# Altium PCB PCB2.PcbDoc
Units mil, origin at the board's own origin, x right, y up, seen from the top; angles counter-clockwise.
Board outline 2655 x 1200 mil, 2 copper layers (Top Layer, Bottom Layer); 25 components, 22 nets, 85 pads, 9 vias.
Unrouted connection lines stored in the file: 2.
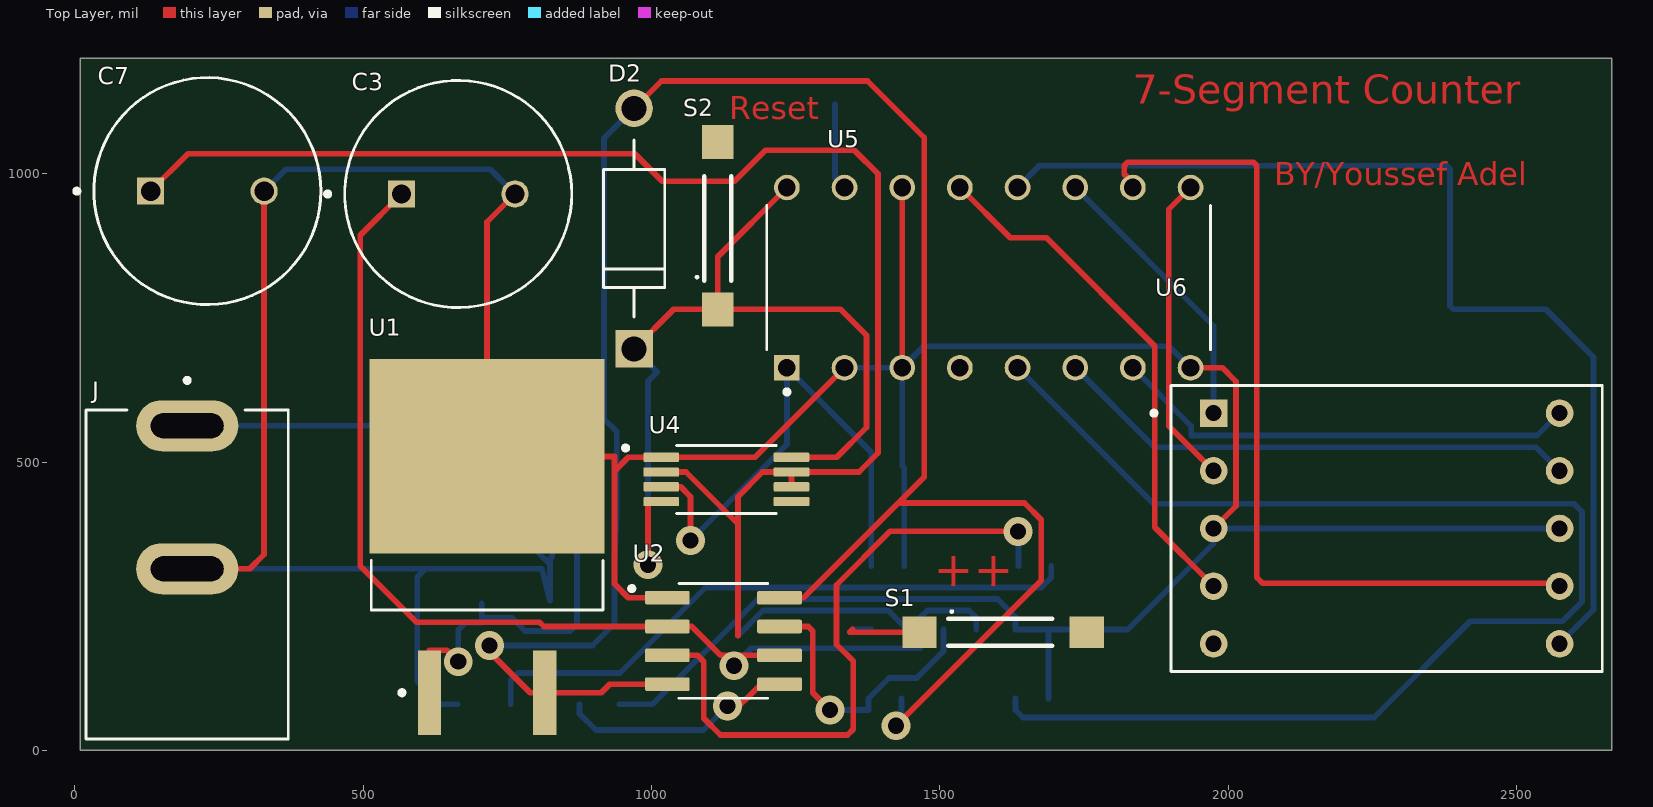
[diagram p0: Top Layer view]
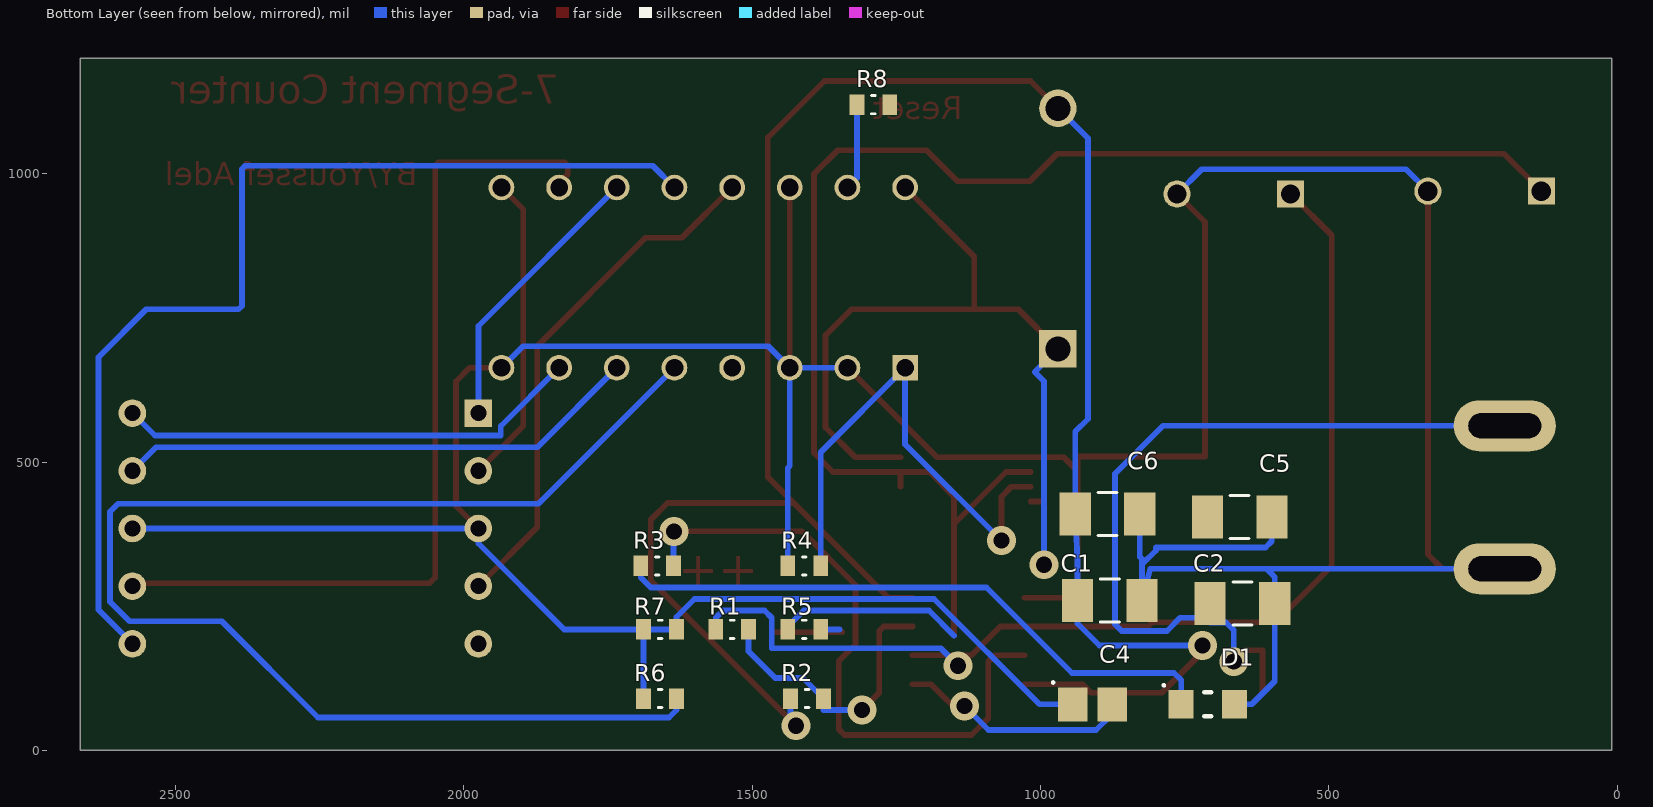
[diagram p1: Bottom Layer view, seen from below]
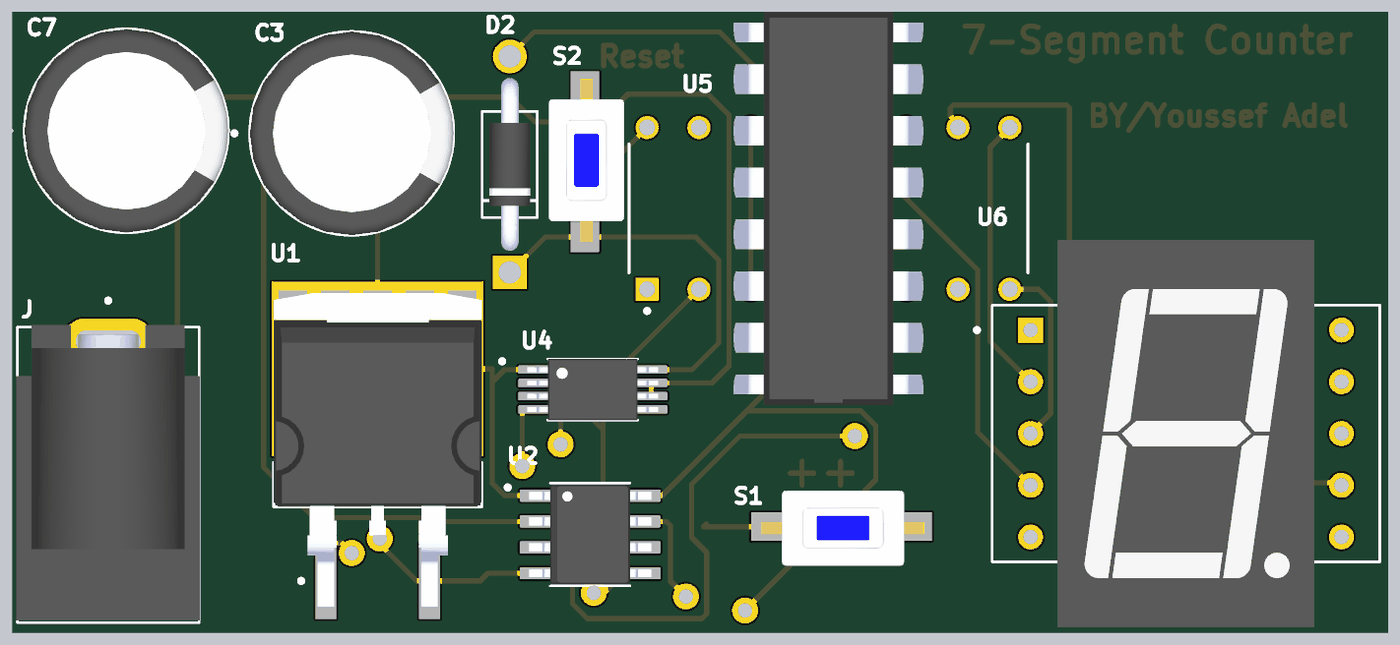
[diagram p2: 3D render of the assembled board from above, using the file's embedded part models]
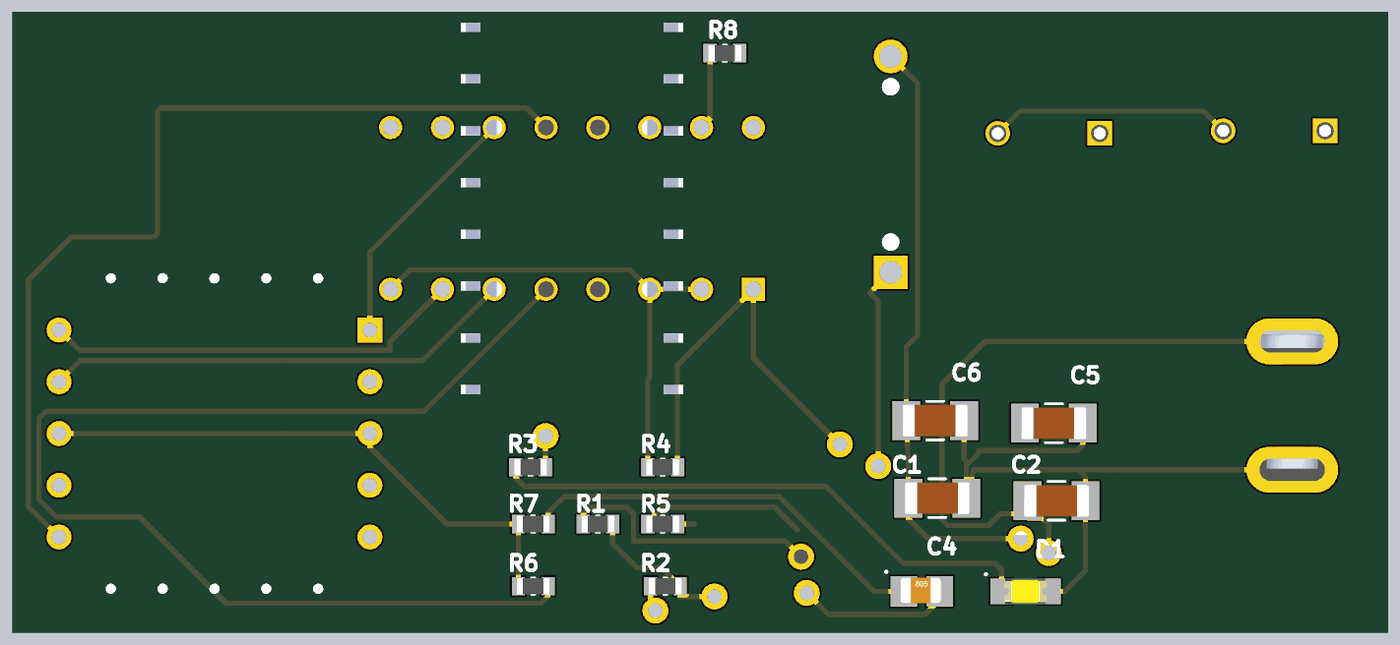
[diagram p3: 3D render of the assembled board from below, using the file's embedded part models]

## Layer stack, top to bottom
Top Solder: solder mask 0.4, Solder Resist, Dk 3.5
Top Layer: signal copper 1.4
Dielectric 1: dielectric 12.6, FR-4, Dk 4.8
Bottom Layer: signal copper 1.4
Bottom Solder: solder mask 0.4, Solder Resist, Dk 3.5

## Board outline
10,0 2665,0 2665,1200 10,1200

## Design rules (kind name [scope] priority, off if disabled: settings)
Clearance [All] p1: gap=10 ignorepadtopadclearanceinfootprint=FALSE
PolygonConnect [All] p1: connectstyle=Relief reliefconductorwidth=10 reliefentries=4 polygonreliefangle="90 Angle" airgapwidth=10
RoutingVias [All] p1: holewidth=28 width=50 viastyle="Through Hole" minholewidth=28 minwidth=50 maxholewidth=28 maxwidth=50
SolderMaskExpansion [All] p1: expansion=4 istentingtop=FALSE
SupplyNets "Schematic Supply Nets_1" [InNet('VCC')] p1: voltage=0.000
SupplyNets "Schematic Supply Nets" [InNet('GND')] p2: voltage=0.000
Width [All] p1: maxlimit=10 minlimit=10 preferedwidth=10
30 further rules are at their usual default settings.

## Classes and differential pairs
component class Sheet2: C5 C6 C7 D2 R4 R5 R6 R7 R8 S1 S2 U4 U5 U6
component class Sheet1: C1 C2 C3 C4 D1 R1 R2 R3 U1 U2

## Components (designator, comment, footprint, x,y, rotation, side; value= is the part's Value field where it differs from the comment)
C1 ".1µF" CAPC3216X190N 880,260 r180 bottom
C2 ".33µF" CAPC3216X190N 650,255 r180 bottom
C3 "EEUED2G100" CAPPRD500W60D1000H2000 665,965 r0 top
C4 "100nF Ceramic Multilayer Capacitor_1" CAPCP2012X09N 910,80 r180 bottom
C5 ".33µF" CAPC3216X190N 655,405 r180 bottom
C6 ".1µF" CAPC3216X190N 884.06,410 r180 bottom
C7 "EEUED2G100" CAPPRD500W60D1000H2000 230,970 r0 top
D1 "Kingbright Orange LED, 200 mcd 120 ° 0805" LED1913X12NYEL/ORANGE 710,80 r180 bottom
D2 "1N4007" DIOAD1060W80L520D270 970,905 r90 top
J "PJ-037AH" CUI_PJ-037AH 195,563.03 r270 top
R1 "Resistor" RES_ERJS03F1001V 1535,210 r180 bottom value=1K
R2 "Resistor" RES_ERJS03F1001V 1405,90 r180 bottom value=1K
R3 "Resistor" RES_ERJS03F1001V 1665,320 r180 bottom value=1K
R4 "Resistor" RES_ERJS03F1001V 1410,320 r180 bottom value=220
R5 "Resistor" RES_ERJS03F1001V 1410,210 r180 bottom value=47k
R6 "Resistor" RES_ERJS03F1001V 1660,90 r180 bottom value=47k
R7 "Resistor" RES_ERJS03F1001V 1660,210 r180 bottom value=470
R8 "Resistor" RES_ERJS03F1001V 1290,1120 r180 bottom value=10k
S1 "Button Tactile Switch, NO 0.05 A 0.8mm" Button8014X17N 1605,205 r0 top
S2 "Button Tactile Switch, NO 0.05 A 0.8mm" Button8014X17N 1115,905 r90 top
U1 "7805CD2T" TO254P1542X460-3N 715,352.52 r90 top
U2 "LM555CM/NOPB" SOIC127P599X175-8N 1125,190 r0 top
U4 "NE555PW" SOP65P640X120-8N 1130,470 r0 top
U5 "CD4033BE" DIP794W45P254L1969H508Q16 1585,820 r90 top
U6 "LDSC512RI" LED_LDSC512RI 2275,385 r0 top

## Footprints (in the part's own frame and the unit in brackets; to place one, negate y for a bottom-side part, rotate by r counter-clockwise, add the part's x,y. Pads: shape width x height; smd on the part's side, far side on the other; paste and mask are expansions set on the pad)
Button8014X17N [mm] "Chip Inductor, 2-Leads, Body 8.00x1.40mm, IPC Medium Density"
  rect 1.5x1.4 smd: 1(-3.556,0) 2(3.81,0)
  silkscreen extent -2.3,-0.6 2.3,0.96, body extent -3.79,-1.92 4.21,1.78, height 2.5
CAPC3216X190N [mm]
  rect 1.37x1.91 smd: 1(-1.421,0) 2(1.421,0)
  silkscreen extent -0.42,-0.95 0.42,0.95, body extent -1.6,-0.8 1.6,0.8, height 1.9
CAPCP2012X09N [mm] "Chip Capacitor, 2-Leads, Body 2.00x1.25mm, IPC Medium Density"
  rect 1.3x1.5 smd: 1(-0.875,0) 2(0.875,0)
  silkscreen extent -1.79,0.91 -1.69,1.01, body extent -1.05,-0.57 0.95,0.68, height 0.78
CAPPRD500W60D1000H2000 [mm]
  round 1.2 hole 0.85: N(2.5,0)
  rect 1.2x1.2 / inner round 1.2 / far side rect 1.2x1.2 hole 0.85: P(-2.5,0)
  silkscreen extent -5.85,-5 5,5, body extent -5,-5 5,5, height 20
CUI_PJ-037AH [mm]
  oval 2.25x4.5 hole 1.1 slot 3.2 at 90 deg: 1(0,0) 2(6.3,0)
  silkscreen extent -2.1,-4.45 13.8,4.45, body extent -0.8,-4.5 13.7,4.5, height 11
DIOAD1060W80L520D270 [mm]
  round 1.65 hole 1.1: A(5.3,0)
  rect 1.65x1.65 / inner round 1.65 / far side rect 1.65x1.65 hole 1.1: C(-5.3,0)
  silkscreen extent -3.9,-1.35 3.9,1.35, body extent -4.24,-1 4.24,1, height 2
DIP794W45P254L1969H508Q16 [mm]
  rect 1.13x1.13 hole 0.78: 1(-3.97,8.89)
  round 1.13 hole 0.78: 2(-3.97,6.35) 3(-3.97,3.81) 4(-3.97,1.27) 5(-3.97,-1.27) 6(-3.97,-3.81) 7(-3.97,-6.35) 8(-3.97,-8.89) 9(3.97,-8.89) 10(3.97,-6.35) 11(3.97,-3.81) 12(3.97,-1.27) 13(3.97,1.27) 14(3.97,3.81) 15(3.97,6.35) 16(3.97,8.89)
  silkscreen extent -5.13,-9.77 3.18,9.77, body extent -9.65,-5.46 9.65,5.46, height 5.08
LED1913X12NYEL/ORANGE [mm] "LED 2-Leads, Body 1.90x1.32mm, IPC Medium Density"
  rect 1.1x1.25 smd: 1(-1.175,0) 2(1.175,0)
  silkscreen extent -1.99,-0.53 0.15,0.89, body extent -1.01,-0.62 1.01,0.63, height 1.1
LED_LDSC512RI [mm]
  rect 1.218x1.218 / inner round 1.218 / far side rect 1.218x1.218 hole 0.71: 1(-7.62,5.08)
  round 1.218 hole 0.71: 2(-7.62,2.54) 3(-7.62,0) 4(-7.62,-2.54) 5(-7.62,-5.08) 6(7.62,-5.08) 7(7.62,-2.54) 8(7.62,0) 9(7.62,2.54) 10(7.62,5.08)
  silkscreen extent -10.35,-6.3 9.5,6.3, body extent -6.3,-9.5 6.3,9.5, height 8
RES_ERJS03F1001V [mm]
  rect 0.65x0.9 smd: 1(-0.725,0) 2(0.725,0)
  silkscreen extent -0.08,-0.4 0.08,0.4, body extent -0.8,-0.4 0.8,0.4, height 0.45
SOIC127P599X175-8N [mm]
  rrect25% 1.97x0.6 smd: 1(-2.47,1.905) 2(-2.47,0.635) 3(-2.47,-0.635) 4(-2.47,-1.905) 5(2.47,-1.905) 6(2.47,-0.635) 7(2.47,0.635) 8(2.47,1.905)
  silkscreen extent -4.14,-2.53 1.95,2.53, body extent -3,-2.45 3,2.45, height 1.75
SOP65P640X120-8N [mm]
  rrect25% 1.57x0.41 smd: 1(-2.87,0.975) 2(-2.87,0.325) 3(-2.87,-0.325) 4(-2.87,-0.975) 5(2.87,-0.975) 6(2.87,-0.325) 7(2.87,0.325) 8(2.87,0.975)
  silkscreen extent -4.54,-1.5 2.2,1.5, body extent -3.2,-1.5 3.2,1.5, height 1.2
TO254P1542X460-3N [mm]
  rect 3.74x1.02 smd: 1(-6.41,2.54) 2(-6.41,-2.54)
  rect 8.56x10.37 smd paste-6: 3(4,0)
  silkscreen extent -6.51,-5.1 -0.59,5.1, body extent -7.71,-5.1 7.71,5.1, height 4.6

## Part data
C1 C2 C5 C6: library part GRM31CR60J227ME11L, "SMD Multilayer Ceramic Capacitor, GRM Series, 220 F, 20%, X5R, 6.3 V, 1206 [3216 Metric]", Package="3216 Murata", Check_prices=https://www.snapeda.com/parts/GRM31CR60J227ME11L/Murata%20Electronics%20North%20America/view-part/1756709/?ref=eda, Digi-Key_Part_Number=490-13970-1-ND, MF="Murata Electronics", MP=GRM31CR60J227ME11L, Purchase-URL=https://pricing.snapeda.com/search/part/GRM31CR60J227ME11L/?ref=eda, SnapEDA_Link=https://www.snapeda.com/parts/GRM31CR60J227ME11L/Murata%20Electronics%20North%20America/view-part/1756709/?ref=snap
C3 C7: "10F 400V Aluminum Electrolytic Capacitors Radial, Can 8000 Hrs @ 105C", Package="RADIAL-2 Panasonic", Check_prices=https://www.snapeda.com/parts/EEU-ED2G100/Panasonic+Electronic+Components/view-part/?ref=eda, MF="Panasonic Electronic", MP=EEU-ED2G100, SnapEDA_Link=https://www.snapeda.com/parts/EEU-ED2G100/Panasonic+Electronic+Components/view-part/?ref=snap
C4: "AVX 0805 Standard 100nF Ceramic Multilayer Capacitor, 50 V dc X7R Dielectric ±10% SMD", Capacitance=100nF, Manufacturer=AVX, Package=0805, Voltage=50V, Creator="Ritesh Kanjee", Datasheet URL=http://za.rs-online.com/web/p/ceramic-multilayer-capacitors/4646688/, Date Created="18 February 2015", RS Stock No.=464-6688
D1: Color=Orange, Forward Voltage=1.85V, Manufacturer=KingBright, Manufacturer Part No.=KP-2012SEC, Creator="Ritesh Kanjee", Datasheet URL=http://za.rs-online.com/web/p/visible-leds/4663790/, Date Created="18 February 2015", RS Stock No.=466-3790
D2: "Diode Standard 1000 V 1A Through Hole DO-41", Package="DO-41 NTE Electronics", Availability="In Stock", Check_prices=https://www.snapeda.com/parts/1N4007/NTE+Electronics/view-part/?ref=eda, MF="NTE Electronics, Inc.", MP=1N4007, Price=None, Purchase-URL=https://pricing.snapeda.com/search/part/1N4007/?ref=eda, SnapEDA_Link=https://www.snapeda.com/parts/1N4007/NTE+Electronics/view-part/?ref=snap
J: "2.0 x 6.5 mm, 5.0 A, Horizontal, Through Hole, Dc Power Jack Connector", Package=None, Check_prices=https://www.snapeda.com/parts/PJ-037AH/CUI+Devices/view-part/?ref=eda, CUI_purchase_URL=https://www.cuidevices.com/product/interconnect/connectors/dc-power-connectors/jacks/pj-037ah?utm_source=snapeda.com&utm_medium=referral&utm_campaign=snapedaBOM, MF="CUI Devices", MP=PJ-037AH, SnapEDA_Link=https://www.snapeda.com/parts/PJ-037AH/CUI+Devices/view-part/?ref=snap
S1 S2: Manufacturer="C & K", Manufacturer Part No.=B3F1000, Creator="R Kanjee", Date Created="25 February 2015", RS Stock No.=516-255, State="Normaly Open"
U1: "Linear Voltage Regulator IC Positive Fixed 1 Output 1.5A D2PAK", Package="D2PAK STMicroelectronics", Check_prices=https://www.snapeda.com/parts/7805CD2T/STMicroelectronics/view-part/?ref=eda, MF=STMicroelectronics, MP=7805CD2T, SnapEDA_Link=https://www.snapeda.com/parts/7805CD2T/STMicroelectronics/view-part/?ref=snap
U2: "Highly Stable 555 Timer", Package="SOIC-8 Texas Instruments", Availability="In Stock", Check_prices=https://www.snapeda.com/parts/LM555CM/NOPB/Texas+Instruments/view-part/?ref=eda, MF="Texas Instruments", MP=LM555CM/NOPB, Price=None, Purchase-URL=https://pricing.snapeda.com/search/part/LM555CM/NOPB/?ref=eda, SnapEDA_Link=https://www.snapeda.com/parts/LM555CM/NOPB/Texas+Instruments/view-part/?ref=snap
U4: "Single Precision Timer 8-TSSOP 0 to 70", Package="TSSOP-8 Texas Instruments", Availability="In Stock", Check_prices=https://www.snapeda.com/parts/NE555PW/Texas+Instruments/view-part/?ref=eda, MF="Texas Instruments", MP=NE555PW, Price=None, Purchase-URL=https://pricing.snapeda.com/search/part/NE555PW/?ref=eda, SnapEDA_Link=https://www.snapeda.com/parts/NE555PW/Texas+Instruments/view-part/?ref=snap
U5: "CMOS Decade Counter/Divider with Decoded 7-Segment Display Outputs and Ripple Blanking 16-PDIP -55 to 125", Package="PDIP-16 Texas Instruments", Availability=Good, Check_prices=https://www.snapeda.com/parts/CD4033BE/Texas%20Instruments/view-part/627730/?ref=eda, MF="Texas Instruments", MP=CD4033BE, Price=None, Purchase-URL=https://pricing.snapeda.com/search/part/CD4033BE/?ref=eda, SnapEDA_Link=https://www.snapeda.com/parts/CD4033BE/Texas%20Instruments/view-part/627730/?ref=snap
U6: "DISPLAY, 7 SEGMENT, 14.2MM, GREEN; LED Colour:Green; Forward Current If:10mA; Forward Voltage:2.2V; Luminous Intensity:3.5mcd; No. of Digits / Alpha:1; Character Size:14.2mm; Common Connection:Common Cathode; Product Range:-; SVHC:No SVHC (27-Jun-2018)", Package="DIP-10 Lumex", Check_prices=https://www.snapeda.com/parts/LDSC512RI/Lumex/view-part/?ref=eda, MF="Lumex Optoelectronics", MP=LDSC512RI, SnapEDA_Link=https://www.snapeda.com/parts/LDSC512RI/Lumex/view-part/?ref=snap
R1 R2 R3 R4 R5 R6 R7 R8: SimulationGenericComponent=True, TC1=0, TC2=0

## Via types
v1: diameter 50, hole 28, Top Layer to Bottom Layer, 9 vias

## Nets (pads, with @x,y where several pads share a name; then routed paths per layer and width w, separated by ;. In a path a pad name is that pad's centre, name@x,y a point inside that pad or via, vN(x,y) a via of type N, cw(c..) or ccw(c..) an arc to the next point about the centre after c; other vN are vias at no path point)
GND: C1.2 C2.2 C3.N C4.1 C5.2 C6.2 C7.N D1.2 J.2 R4.1 R6.1 R7.1 R7.2 U1.3 U2.1 U4.1 U5.2 U5.3 U5.8 U5.14 U6.3 U6.8 | length 7728.5
  Top Layer w10: J.2 303.43,315 328.43,340 C7.N ; C3.N 715,916.57 U1.3 935.94,510 935.94,484.33 ; U2.1 960,265 935.94,289.06 935.94,484.33 ; U5.2 1179.69,508.39 U4.1 960,508.39 935.94,484.33 ; U5.3 U5.14 ; U5.8 1990.3,663.7 2014,640 2014,424 U6.3
  Bottom Layer w10: J.2 608.08,315 ; C7.N 366.43,1008 720.43,1008 C3.N ; C5.2 599.06,362.94 610,352 800,352 800,347 824.06,322.94 ; D1.2 634.05,80 594.05,120 C2.2 594.05,300.95 608.08,315 ; C6.2 828.11,336.06 824.06,332 824.06,322.94 ; C4.1 1002,80 1184.72,262.72 1600.28,262.72 1631.46,231.54 R7.2 R7.1 ; U5.2 U5.3 ; R4.1 1438.54,490 1435,493.54 U5.3 ; R6.1 R7.1 ; U5.8 1897.7,701 1472.3,701 U5.3 ; U6.8 U6.3 1975,359 1826,210 R7.1 ; 608.08,315 810,315 C1.2 824.06,322.94
NetC2_1: C2.1 J.1 U1.1 | length 1416.8
  Top Layer w10: U1.1 615,174 645,174 v1(665,154)
  Bottom Layer w10: J.1 787.97,563.03 871,480 871,219 859.4,207.4 781,207.4 758.4,230 C2.1@705.94,230 ; v1(665,154) 665,208.75 678.4,222.15 705.94,222.15 C2.1@705.94,230 ; C2.1 C2.1@705.94,230
NetC3_P: C3.P R1.1 U2.2 U2.6 | length 2007.9
  Top Layer w10: C3.P 495,893.43 495,320 592.48,222.52 806.14,222.52 813.66,215 U2.2 1070,215 1120,165 1161,165 ; v1(1143,147) 1161,165 ; U2.6 1161,165
  Bottom Layer w10: v1(1143,147) 1173.28,177.28 1466.34,177.28 1466.34,230 1479.06,242.72 1550.82,242.72 1563.54,230 R1.1
NetC4_2: C4.2 U2.5 | length 435.9
  Top Layer w10: v1(1132,77) 1132,57 1190,115 U2.5
  Bottom Layer w10: C4.2 875.55,63.78 903.86,35.47 1090.47,35.47 v1(1132,77)
NetC5_1: C5.1
NetC7_P: C7.P R5.1 U4.2 U4.6 U4.7 | length 2866.2
  Top Layer w10: C7.P 196.57,1035 971,1035 1019,987 1144,987 1198,1041 1352,1041 1393,1000 1393,515.8 1360,482.8 U4.7 ; U4.2 1060,482.8 1150,392.8 ; 1150,199 1150,392.8 ; U4.6 U4.7 ; 1150,392.8 1150,440 1192.8,482.8 U4.7
  Bottom Layer w10: 1150,199 1193.72,242.72 1410.82,242.72 1438.54,215 R5.1
NetD1_1: D1.1 R3.1 | length 1073.2
  Bottom Layer w10: D1.1 756.26,122.26 768.49,134.49 945.76,134.49 1093.98,282.72 1676.26,282.72 1693.54,300 R3.1
NetD2_C: D2.C S2.1 U4.4 U4.8 U5.16 | length 1552.6
  Top Layer w10: D2.C 1038.66,765 S2.1 ; v1(994,322) 994,431.61 U4.4 ; U5.16 1115,856.3 S2.1 ; U4.8 1321.39,508.39 1373,560 1373,720 1328,765 S2.1
  Bottom Layer w10: D2.C 1010,656.34 994,640.34 v1(994,322)
NetR1_2: R1.2 R2.2 U2.7 | length 498.9
  Top Layer w10: U2.7 1272,215 1280,207 1280,100 v1(1310,70)
  Bottom Layer w10: v1(1310,70) 1376.46,70 R2.2 1412.03,125.58 1460,125.58 1506.46,172.03 R1.2
NetR3_2: R3.2 U2.3 | length 1116.7
  Top Layer w10: U2.3 1080,165 1091,154 1091,56 1120,27 1340,27 1350,37 1350,155 1321,184 1321,287 1414,380 v1(1636,380)
  Bottom Layer w10: v1(1636,380) 1636.46,379.54 R3.2
NetR4_2: R4.2 U4.3 U5.1 | length 907.4
  Top Layer w10: U4.3 1050.8,457.2 1068,440 v1(1068,364)
  Bottom Layer w10: v1(1068,364) 1235,531 U5.1 1381.46,517.24 R4.2
NetR5_2: R5.2 S1.1 | length 160.5
  Top Layer w10: 1349,210 1344,205 S1.1
  Bottom Layer w10: 1349,210 R5.2
NetR6_2: R6.2 U5.5 | length 2329.6
  Bottom Layer w10: R6.2 1631.46,70 1644.46,57 2253,57 2420,224 2580,224 2614,258 2614,414 2600,428 1870.7,428 U5.5
NetR8_1: R8.1 U5.15 | length 150.5
  Bottom Layer w10: R8.1 1318.54,992.76 U5.15
NetU5_6: U5.6 U6.9 | length 914
  Bottom Layer w10: U5.6 1872.68,526.02 2533.98,526.02 U6.9
NetU5_7: U5.7 U6.10 | length 814.6
  Bottom Layer w10: U5.7 1936.02,562.68 1936.02,546.02 2536.02,546.02 U6.10
NetU5_9: U5.9 U6.2 | length 539.3
  Top Layer w10: U5.9 1897,938.3 1897,563 U6.2
NetU5_10: U5.10 U6.7 | length 1524.3
  Top Layer w10: U5.10 1835,984.4 1820,999.4 1820,1014.14 1825.86,1020 2044.14,1020 2050,1014.14 2050,300 2060,290 2570,290 U6.7
NetU5_11: U5.11 U6.1 | length 490.7
  Bottom Layer w10: U5.11 1975,736.3 U6.1
NetU5_12: U5.12 U6.6 | length 1812.6
  Bottom Layer w10: U5.12 1672.7,1014 2379.14,1014 2385,1008.14 2385,770.86 2390.86,765 2551,765 2634,682 2634,244 U6.6
NetU5_13: U5.13 U6.4 | length 910.3
  Top Layer w10: U5.13 1622.3,889 1685,889 1873,701 1873,387 U6.4
VCC: C1.1 C6.1 D2.A R2.1 U1.2 U2.4 U2.8 | length 3774.1
  Top Layer w10: v1(719,182) 719,171.16 790,100.16 U1.2 913,100.16 927.84,115 U2.4 ; D2.A 1017.34,1161 1375,1161 1473,1063 1473,474 1428,429 ; U2.8 1264,265 1428,429 ; v1(1424,43) 1676,295 1676,400 1647,429 1428,429
  Bottom Layer w10: v1(719,182) 897.94,182 935.94,220 C1.1 935.94,330.94 C6.1 940,553 918,575 918,1061.66 D2.A ; v1(1424,43) 1433.54,52.54 R2.1
pads on no net: R8.2 S1.2 S2.2 U4.5 U5.4 U6.5

## Other copper
Top Layer:
  text "7-Segment Counter" at 1835,1121.66 h50
  text "Reset" at 1135,1095 h40
  text "BY/Youssef Adel" at 2080,980 h40
  text "++" at 1490,285 h60